# Altium PCB NixieClock.PcbDoc
Units mil, origin at the board's own origin, x right, y up, seen from the top; angles counter-clockwise.
Board outline 9855.03 x 1995.03 mil, 2 copper layers (Top Layer, Bottom Layer); 72 components, 151 nets, 487 pads, 60 vias.
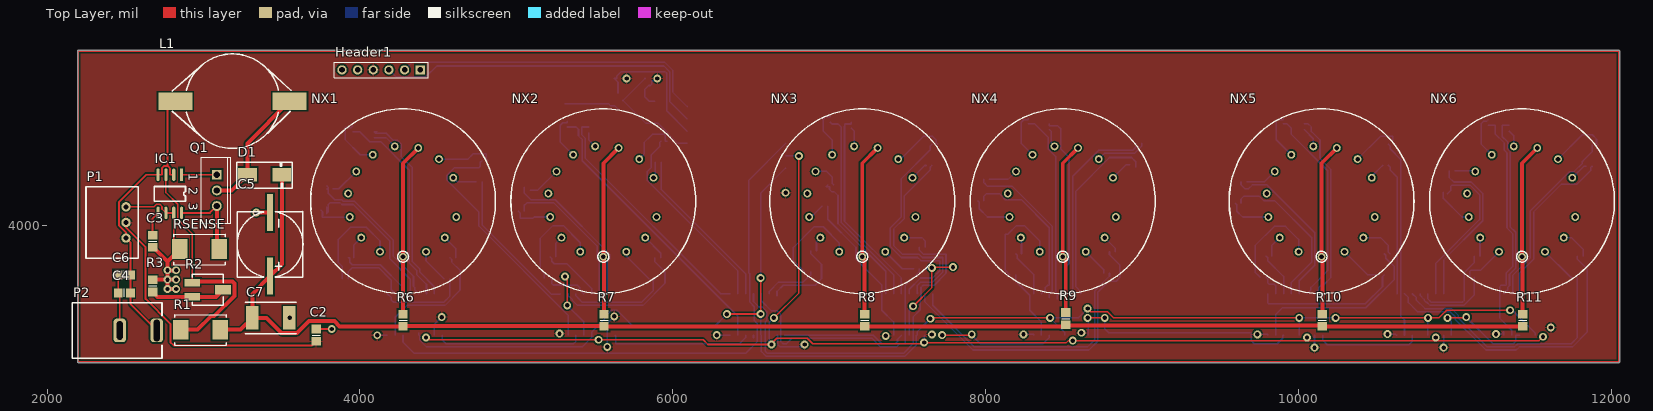
[diagram p0: Top Layer view]
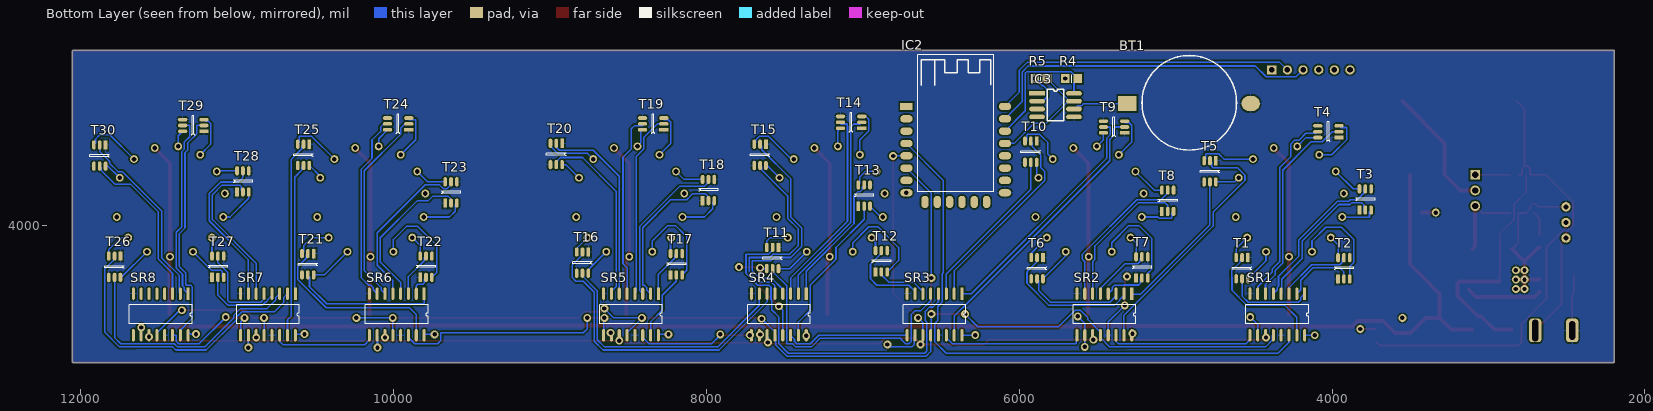
[diagram p1: Bottom Layer view, seen from below]

## Layer stack, top to bottom
Top Solder: solder mask 0.4, Solder Resist, Dk 3.5
Top Layer: signal copper 1.4
Dielectric 1: dielectric 12.6, FR-4, Dk 4.8
Bottom Layer: signal copper 1.4
Bottom Solder: solder mask 0.4, Solder Resist, Dk 3.5

## Board outline
2201.33,3125.17 cw(c2200,3130) 2194.99,3130 2194.99,5115 cw(c2200,5115) 2200,5120.02 12045,5120.02 cw(c12045,5115) 12050.01,5115 12050.01,3130.03 12050.01,3130 cw(c12045,3130) 12045,3124.99 2202.67,3124.99 cw(c2202.67,3130)

## Design rules (kind name [scope] priority, off if disabled: settings)
Clearance [All] p1: gap=10 ignorepadtopadclearanceinfootprint=FALSE except(0: Arc-Hole Track-Hole SMDPad-Hole THPad-Hole Via-Hole Fill-Hole Poly-Hole Region-Hole Text-Hole)
PolygonConnect [All] p1: connectstyle=Relief reliefconductorwidth=10 reliefentries=4 polygonreliefangle="90 Angle" airgapwidth=10
RoutingVias [All] p1: holewidth=28 width=50 viastyle="Through Hole" minholewidth=28 minwidth=50 maxholewidth=28 maxwidth=50
SolderMaskExpansion [All] p1: expansion=4
Width [All] p1: maxlimit=25 minlimit=10 preferedwidth=12 minimp=50.000000 maximp=50.000000 favimp=50.000000
30 further rules are at their usual default settings.

## Classes and differential pairs
component class Hours: BT1 Header1 IC2 IC3 NX1 NX2 NX3 NX4 NX5 NX6 R4 R5 R6 R7 R8 R9 R10 R11 SR1 SR3 SR4 SR5 SR7 SR8 T1 T2 T3 T4 T5 T6 T7 T8 T9 T10 T11 T12 T13 T14 T15 T16 T17 T18 T19 T20 T21 T22 T23 T24 T25 T26 T27 T28 T29 T30
component class Power: C2 C3 C4 C5 C6 C7 D1 IC1 L1 P1 P2 Q1 R1 R2 R3 RSENSE

## Components (designator, comment, footprint, x,y, rotation, side; value= is the part's Value field where it differs from the comment)
BT1 "Battery" cr1220 5307.4,4780 r180 bottom
C2 "Cap" 6-0805_M 3720,3300 r270 top value=10uF
C3 "Cap" 6-0805_M 2675,3900 r90 top value=10uF
C4 "Cap" 6-0805_M 2494.37,3570 r0 top value=100nF
C5 "Cap2" G17 3425,3880 r270 top value=4.7uF
C6 "Cap" 6-0805_M 2495,3685 r0 top value=10uF
C7 "Cap" Cap2420 3430,3410 r180 top value=100nF
D1 "Diode" DO-214AA 3390.63,4325 r0 top
Header1 "Header 6" HDR1X6 4385,4995 r180 top
IC1 "MAX1771ESA" SOIC-8(1.27mm) 2860,4325 r270 top
IC2 "ESP12-F" ESP12-F 6720,4761.22 r180 bottom
IC3 "DS3232MZ+" DS3231 5885,4845 r180 bottom
L1 "Inductor" SMDInductor 3185,4795 r0 top value=100mH
NX1 "in-18" in-18 4275,4155.69 r0 top locked
NX2 "in-18" in-18 5555,4155.69 r0 top locked
NX3 "in-18" in-18 7210,4155.69 r0 top locked
NX4 "in-18" in-18 8490.88,4155.69 r0 top locked
NX5 "in-18" in-18 10145,4155.69 r0 top locked
NX6 "in-18" in-18 11425.88,4155.69 r0 top locked
P1 "R-78E3.3-1.0" R-78E3.3-1.0 2505,4020 r90 top
P2 "BarrelConnector5.5" BarrelConnector5.5 2465,3330 r90 top
Q1 "MOSFET-N" TO-220-AB 3085,4225 r270 top
R1 "Res1" Res2512 2980,3335 r0 top value=1.5M
R2 "RPot" PVG3G 2929,3590 r270 top value=5K
R3 "Res1" 6-0805_M 2675,3615 r270 top value=10K
R4 "Res1" 6-0805_M 5664.37,4940 r0 bottom value=4.7K
R5 "Res1" 6-0805_M 5860.63,4940 r0 bottom value=4.7K
R6 "Res1" 6-0805_M 4275,3395 r90 top value=20K
R7 "Res1" 6-0805_M 5560,3395 r90 top value=20K
R8 "Res1" 6-0805_M 7225,3395 r90 top value=20K
R9 "Res1" 6-0805_M 8510,3405 r90 top value=20K
R10 "Res1" 6-0805_M 10150,3395 r90 top value=20K
R11 "Res1" 6-0805_M 11430,3395 r90 top value=20K
RSENSE "Res1" Res2512 2975,3850 r0 top value=0.05
SR1 "74VHC595" 74VHC595 4175,3565 r270 bottom
SR2 "74VHC595" 74VHC595 5280,3565 r270 bottom
SR3 "74VHC595" 74VHC595 6365,3565 r270 bottom
SR4 "74VHC595" 74VHC595 7360,3565 r270 bottom
SR5 "74VHC595" 74VHC595 8305,3565 r270 bottom
SR6 "74VHC595" 74VHC595 9802.02,3565 r270 bottom
SR7 "74VHC595" 74VHC595 10625,3565 r270 bottom
SR8 "74VHC595" 74VHC595 11310,3565 r270 bottom
T1 "A42-array" SOT457 4537.6,3795.83 r270 bottom
T2 "A42-array" SOT457 3961.52,3659.17 r90 bottom
T3 "A42-array" SOT457 3824.8,4099.17 r90 bottom
T4 "A42-array" SOT457 3955,4562.6 r0 bottom
T5 "A42-array" SOT457 4742.6,4415 r270 bottom
T6 "A42-array" SOT457 5847.6,3795.83 r270 bottom
T7 "A42-array" SOT457 5252.4,3665 r90 bottom
T8 "A42-array" SOT457 5087.4,4090.94 r90 bottom
T9 "A42-array" SOT457 5325,4592.6 r0 bottom
T10 "A42-array" SOT457 5887.6,4540 r270 bottom
T11 "A42-array" SOT457 7537.6,3860.83 r270 bottom
T12 "A42-array" SOT457 6917.4,3704.17 r90 bottom
T13 "A42-array" SOT457 7027.4,4124.17 r90 bottom
T14 "A42-array" SOT457 7005,4622.6 r0 bottom
T15 "A42-array" SOT457 7617.6,4520 r270 bottom
T16 "A42-array" SOT457 8752.6,3831.66 r270 bottom
T17 "A42-array" SOT457 8227.4,3685 r90 bottom
T18 "A42-array" SOT457 8022.4,4159.17 r90 bottom
T19 "A42-array" SOT457 8270,4612.6 r0 bottom
T20 "A42-array" SOT457 8920,4525.83 r270 bottom
T21 "A42-array" SOT457 10507.6,3820.83 r270 bottom
T22 "A42-array" SOT457 9827.4,3669.17 r90 bottom
T23 "A42-array" SOT457 9667.4,4144.17 r90 bottom
T24 "A42-array" SOT457 9900,4612.6 r0 bottom
T25 "A42-array" SOT457 10535.2,4520 r270 bottom
T26 "A42-array" SOT457 11742.6,3805 r270 bottom
T27 "A42-array" SOT457 11157.4,3669.17 r90 bottom
T28 "A42-array" SOT457 10997.4,4214.17 r90 bottom
T29 "A42-array" SOT457 11209.17,4602.6 r0 bottom
T30 "A42-array" SOT457 11837.6,4515.83 r270 bottom

## Footprints (in the part's own frame and the unit in brackets; to place one, negate y for a bottom-side part, rotate by r counter-clockwise, add the part's x,y. Pads: shape width x height; smd on the part's side, far side on the other; paste and mask are expansions set on the pad)
6-0805_M [mm] "Chip Resistor, Body 2.0x1.2mm, IPC Low Density"
  rect 1.4x1.5 smd: 1(-1,0) 2(1,0)
  silkscreen extent 0,-0.65 0,0.65, body extent -1.07,-0.7 1.07,0.7, height 0.7
74VHC595 [mm]
  rect 2x0.5 smd: 1(0,0)
  oval 2x0.5 smd: 2(0,-1.27) 3(0,-2.54) 4(0,-3.81) 5(0,-5.08) 6(0,-6.35) 7(0,-7.62) 8(0,-8.89) 9(6.75,-8.89) 10(6.75,-7.62) 11(6.75,-6.35) 12(6.75,-5.08) 13(6.75,-3.81) 14(6.75,-2.54) 15(6.75,-1.27) 16(6.75,0)
  silkscreen extent 1.84,-9.53 4.91,0.63
BarrelConnector5.5 [mm]
  rrect50% 3.81x2 hole 1 slot 3.5 at 0 deg: 1(0,-6)
  rrect50% 3.81x2 hole 1 slot 3 at 0 deg: 2(0,0)
  silkscreen extent -4.5,-6.86 4.5,7.7
Cap2420 [mm]
  rect 2x3.8 smd: 1(-3,0) 2(3,0)
  silkscreen extent -4.14,-2.54 4.14,2.54
cr1220 [mm]
  rect 3x2.5 smd: 1(0,0)
  oval 3x2.5 smd: 2(20,0)
  silkscreen extent 2.36,-7.55 17.71,7.8, body extent 2.41,-7.62 21.84,7.75, height 4
DO-214AA [mil]
  rect 120x86 smd: 1(-110,0) 2(110,0)
  silkscreen extent -177,-85 177,80
DS3231 [mil]
  rect 100x30 smd: 1(0,0)
  oval 100x30 smd: 2(0,-50) 3(0,-100) 4(0,-150) 5(236,-150) 6(236,-100) 7(236,-50) 8(236,0)
  silkscreen extent 65,-175 170,25, body extent 40,-185 195,30, height 69
ESP12-F [mm]
  rect 2x1.2 smd: 1(0,0)
  oval 2x1.2 smd: 2(0,-2) 3(0,-4) 4(0,-6) 5(0,-8) 6(0,-10) 7(0,-12) 8(0,-14) 15(16,-14) 16(16,-12) 17(16,-10) 18(16,-8) 19(16,-6) 20(16,-4) 21(16,-2) 22(16,0)
  oval 1.2x2 smd: 9(3.018,-15.492) 10(5.018,-15.492) 11(7.018,-15.492) 12(9.018,-15.492) 13(11.018,-15.492) 14(13.018,-15.492)
  silkscreen extent 1.84,-13.84 14.17,8.38
G17 [mm]
  rect 6x1 smd: 1(5.15,0) 2(-5.15,0)
  silkscreen extent -5.33,-5.33 5.31,5.35
HDR1X6 [mm] "Connector; Header; 6 Position"
  rect 1.5x1.5 hole 0.9: 1(0,0)
  round 1.5 hole 0.9: 2(2.54,0) 3(5.08,0) 4(7.62,0) 5(10.16,0) 6(12.7,0)
  silkscreen extent -1.27,-1.27 13.97,1.27
in-18 [mm]
  round 1.27 hole 0.75: 1(8.629,-2.556) 2(6.792,-5.904) 3(3.732,-8.19) 4(0,-9) 5(-3.732,-8.19) 6(-6.792,-5.904) 7(-8.629,-2.556) 8(-8.912,1.253) 9(-7.591,4.836) 10(-4.902,7.548) 11(-1.33,8.901) 12(2.481,8.651) 13(5.845,6.844) 14(8.157,3.804)
  silkscreen extent -15,-15 15,15
PVG3G [mil]
  rect 47x100 smd: 1(45,0) 3(-45,0)
  rect 59x100 smd: 2(0,196)
  silkscreen extent -100,0 100,196
R-78E3.3-1.0 [mm]
  round 1.5 hole 0.8: 1(-2.54,0) 2(0,0) 3(2.54,0)
  silkscreen extent -5.8,-2 5.8,6.5
Res2512 [mm]
  rect 2.5x3.2 smd: 1(-3.2,0) 2(3.2,0)
  silkscreen extent -4.19,-2.54 4.19,2.41
SMDInductor [mm]
  rect 5.5x2.79 smd: 1(-9.27,0) 2(9.27,0)
  silkscreen extent -9.78,-7.67 9.53,7.67
SOIC-8(1.27mm) [mil]
  rect 80x20 smd: 1(0,0)
  oval 80x20 smd: 2(0,-50) 3(0,-100) 4(0,-150) 5(244,-150) 6(244,-100) 7(244,-50) 8(244,0)
  silkscreen extent 75,-175 169,25
SOT457 [mm]
  rect 1.5x0.6 smd: 1(0,0)
  oval 1.5x0.6 smd: 2(0,-0.95) 3(0,-1.9) 4(3.45,-1.9) 5(3.45,-0.95) 6(3.45,0)
  silkscreen extent 1.52,-2.54 2,0.63
TO-220-AB [mm] "TO, Thru-Hole, Vertical, Heatsink Mounted; 3 In-Line Leads; Pitch 2.54 mm"
  rect 1.6x1.6 hole 1: 1(-2.54,0)
  round 1.6 hole 1: 2(0,0) 3(2.54,0)
  silkscreen extent -5.35,-2.55 5.35,2.25

## Part data
BT1: "Multicell Battery", LatestRevisionDate=17-Jul-2002, LatestRevisionNote="Re-released for DXP Platform.", PackageDescription="Battery; 2 Leads", PackageReference=BAT-2, Published=24-Mar-1999, Publisher="Altium Limited"
C2 C3 C4 C5 C6 C7: "Capacitor", Publisher="Altium Limited"
  C2 C3 C4 C6 C7: LatestRevisionDate=17-Jul-2002, LatestRevisionNote="Re-released for DXP Platform.", PackageDescription="Radial Cap, Thru-Hole; 2 Leads; 0.3 in Pin Spacing", PackageReference=RAD-0.3, Published=8-Jun-2000
  C5: PackageDescription="Capacitor; 2 Leads", PackageReference=CAPR5-4X5, Published=23-Sep-2002
D1: "Default Diode", Code_JEDEC=DO-214-AB, LatestRevisionDate=17-Jul-2002, LatestRevisionNote="Re-released for DXP Platform.", PackageDescription="DO-214-AB/SMC; 2 C-Bend Leads; Body 7.9 x 5.9 mm, inc. leads (LxW)", PackageReference=SMC, PackageVersion=Sep-1996, Published=8-Jun-2000, Publisher="Altium Limited"
Header1: "Header, 6-Pin", LatestRevisionDate=17-Jul-2002, LatestRevisionNote="Re-released for DXP Platform.", Publisher="Altium Limited"
IC3: "+/-5ppm, I2C Real-Time Clock with Internal MEMs Resonator and SRAM, 8-Pin SO, -40 to 85 degC, Pb-Free", Code_IPC=SOIC127P600-8, Code_JEDEC=MS-012-AA, ComponentLink1Description="Manufacturer URL", ComponentLink1URL=http://www.maxim-ic.com, ComponentLink2Description=Datasheet, ComponentLink2URL=http://datasheets.maxim-ic.com/en/ds/DS3232M.pdf, ComponentLink3Description="Package Specification", ComponentLink3URL=http://pdfserv.maxim-ic.com/package_dwgs/21-0041.PDF, DatasheetVersion="Rev 0, Mar-2012", PackageDescription="8-Pin Small-Outline IC, Narrow (0.15in), 1.27 mm Pitch, SOIC (N), Pb-Free", PackageReference=S8MK+1, PackageVersion="revC, 2010"
Q1: "N-Channel MOSFET", LatestRevisionDate=17-Jul-2002, LatestRevisionNote="Re-released for DXP Platform.", PackageDescription="TO, Flat Index; 3 In-Line, Axial Leads; Body Dia. 4.6mm; Lead Dia. 0.5 mm (max)", PackageReference=E3, PackageVersion=1995/1996, Published=8-Jun-2000, Publisher="Altium Limited"
R1 R3 R4 R5 R6 R7 R8 R9 R10 R11 RSENSE: "Resistor", LatestRevisionDate=17-Jul-2002, LatestRevisionNote="Re-released for DXP Platform.", PackageDescription="Axial Device, Thru-Hole; 2 Leads; 0.3 in Pin Spacing", PackageReference=AXIAL-0.3, Published=8-Jun-2000, Publisher="Altium Limited"
R2: "Potentiometer", LatestRevisionDate=17-Jul-2002, LatestRevisionNote="Re-released for DXP Platform.", PackageDescription="Variable Resistor, Thru-Hole; 3 Leads", PackageReference=VR5, Published=8-Jun-2000, Publisher="Altium Limited", Set Position=0.5, Sim Note="Enter the Resistance value and the set point into parameter fields."
L1: Code_IEC=1005, Code_JEITA=0402, LatestRevisionDate=29-May-2009, LatestRevisionNote="IPC-7351 Footprint Added.", PackageDescription="Chip Inductor", PackageReference=0402-A, Published=8-Jun-2000, Publisher="Altium Limited"

## Via types
v1: diameter 50, hole 28, Top Layer to Bottom Layer, 60 vias

## Nets (pads, with @x,y where several pads share a name; then routed paths per layer and width w, separated by ;. In a path a pad name is that pad's centre, name@x,y a point inside that pad or via, vN(x,y) a via of type N, cw(c..) or ccw(c..) an arc to the next point about the centre after c; other vN are vias at no path point)
3V3: C2.2 Header1.4 IC2.8 IC3.2 P1.2 R4.2 R5.2 SR1.10 SR1.16 SR2.10 SR2.16 SR3.10 SR3.16 SR4.10 SR4.16 SR5.10 SR5.16 SR6.10 SR6.16 SR7.10 SR7.16 SR8.10 SR8.16 | length 3286.4
  Top Layer w10: v1(7655,3304.02) v1@7659.88,3299.14
  Top Layer w12: P1.2 2505,3986.73 2629.47,3862.25 2629.47,3532.07 2788.8,3372.74 2788.8,3256.01 2810,3234.81 3694.18,3234.81 C2.2
  Bottom Layer w10: v1(4110.42,3299.25) SR1.16 ; SR1.10 4475,3367.23 v1(4522.77,3415) ; v1(5275,3310) 5280,3305 SR2.16 ; v1(5580,3225) SR2.10 5580,3375 v1(5625,3420) ; IC3.2 5848.79,4795 5820,4823.79 5820,4870 5845.47,4895.47 5855.03,4895.47 5863.82,4904.26 5863.82,4924.83 5885,4924.83 v1(5900,4939.83) ; v1(6280,3300) 6365,3300 SR3.16 ; SR3.10 6670.16,3299.25 6670.16,3239.43 6684.71,3224.88 6826.35,3224.88 v1(6841.47,3240) ; v1(8240,3305) 8305,3305 SR5.16 ; v1(9735,3305) 9802.02,3305 SR6.16 ; v1(10100,3220) 10100,3297.24 SR6.10 ; v1(10566.2,3306.57) 10617.68,3306.57 SR7.16 ; v1(10925,3220) SR7.10 ; v1(11260,3306.57) 11295.65,3306.57 11310,3320.93 SR8.16
  other v1: 7360,3295 8610,3315 11610,3349.01 6720,4210.04 5703.74,4940
12V: C4.2 C6.2 IC1.2 IC1.4 L1.1 P1.1 P2.1 | length 1872.4
  Top Layer w12: P2.1 2533.74,3497.48 C4.2 2534.37,3570.63 C6.2 2534.37,3890.63 P1.1 2505,3955.61 2459.47,4001.14 2459.47,4049.69 2460,4050.22 2460,4100.61 2459.47,4101.14 2459.47,4149.47 2635,4325 IC1.4 2734,4325 2734,4365.77 2749.23,4381 2770.77,4381 ; IC1.2 2786,4325 2786,4365.77 2770.77,4381 ; L1.1 2770.77,4745.73 2770.77,4381
GND: BT1.2 C2.1 C3.1 C4.1 C5.2 C6.1 C7.1 Header1.6 IC1.6 IC1.7 IC2.15 IC3.5 P1.3 P2.2 R3.1 RSENSE.1 SR1.8 SR1.13 SR2.8 SR2.13 SR3.8 SR3.13 SR4.8 SR4.13 SR5.8 SR5.13 SR6.8 SR6.13 SR7.8 SR7.13 SR8.8 SR8.13 T1.1 T1.4 T2.1 T2.4 T3.1 T3.4 T4.1 T4.4 T5.1 T5.4 T6.1 T6.4 T7.1 T7.4 T8.1 T8.4 T9.1 T9.4 T10.1 T10.4 T11.1 T11.4 T12.1 T12.4 T13.1 T13.4 T14.1 T14.4 T15.1 T15.4 T16.1 T16.4 T17.1 T17.4 T18.1 T18.4 T19.1 T19.4 T20.1 T20.4 T21.1 T21.4 T22.1 T22.4 T23.1 T23.4 T24.1 T24.4 T25.1 T25.4 T26.1 T26.4 T27.1 T27.4 T28.1 T28.4 T29.1 T29.4 T30.1 T30.4 | length 2930.8
  Top Layer w10: C6.1 2455.63,3570.63 C4.1 2465,3560 P2.2 ; P1.3 2683.64,4120 2699.64,4136 2720.36,4136 2735,4121.36 2735,4106 IC1.6 ; C7.1 v1(3550,3410) ; C2.1 v1(3819.37,3339.37) ; v1(5310,3675) 5325,3660 v1(5325,3490) ; v1(7535,3485) 7655,3605 v1(7655,3730) 7660,3735 v1(7790,3735)
  Top Layer w12: IC1.6 IC1.7 2810,3889.02 RSENSE.1
  Top Layer w25: R3.1 2769.37,3654.37 v1(2770,3655) ; C3.1 2680.35,3860.63 2770,3770.98 ; v1@2824.02,3655 v1(2770,3655) ; v1(2825,3595) v1(2770,3595) v1(2770,3655) ; v1(2825,3714.17) v1(2770,3714.17) ; RSENSE.1 2770,3770.98 ; v1(3337.24,4082.76) C5.2 ; v1(2770,3655) v1(2770,3714.17) ; v1(2770,3714.17) 2770,3770.98
  Bottom Layer w10: v1(5325,3490) 5430,3385 SR2.13 ; SR3.13@6515,3284.59 SR3.13 ; SR4.13 7510,3460 v1(7535,3485) ; T11.4 7650,3725 v1(7655,3730)
  other v1: 2825,3655
HA0: NX1.2 T1.3 | length 156.4
  Bottom Layer w10: NX1.2 4612.4,3853.22 T1.3
HA1: NX1.3 T1.6 | length 221.2
  Bottom Layer w10: NX1.3 4421.94,3775.66 T1.6
HA2: NX1.5 T2.3 | length 668.3
  Bottom Layer w10: T2.3 3886.72,3739.37 3859.91,3766.18 3859.91,3883.28 3860,3883.38 3860,3910 3940,3990 4040,3990 4128.07,3901.93 NX1.5
HA3: NX1.6 T2.6 | length 147.3
  Bottom Layer w10: T2.6 3961.52,3877.16 NX1.6
HA4: NX1.7 T3.3 | length 223.8
  Bottom Layer w10: T3.3 3760.59,4088.58 3760.59,4054.65 3934.87,4054.65 NX1.7
HA5: NX1.9 T3.6 | length 197.4
  Bottom Layer w10: T3.6 3865.09,4235 NX1.9
HA6: NX1.10 T4.3 | length 348.5
  Bottom Layer w10: T4.3 3944.41,4626.81 3905,4626.81 3905,4550 4002.15,4452.85 NX1.10
HA7: NX1.11 T4.6 | length 155.2
  Bottom Layer w10: T4.6 4166.15,4562.6 NX1.11
HA8: NX1.13 T5.3 | length 365.1
  Bottom Layer w10: NX1.13 4690.17,4425.12 4724.57,4459.53 4807.28,4459.53 4807.28,4425.12 T5.3
HA9: NX1.14 T5.6 | length 157.3
  Bottom Layer w10: NX1.14 4622.39,4279.17 T5.6
HB0: NX2.2 T6.3 | length 168.8
  Bottom Layer w10: NX2.2 5922.4,3823.22 T6.3
HB1: NX2.3 T6.6 | length 233.6
  Bottom Layer w10: NX2.3 5701.94,3805.66 T6.6
HB2: NX2.5 T7.3 | length 657.5
  Bottom Layer w10: T7.3 5177.6,3695.12 5150.79,3721.93 5150.79,3916.99 5233.8,4000 5298.77,4000 5408.07,3890.7 NX2.5
HB3: NX2.6 T7.6 | length 137
  Bottom Layer w10: T7.6 5252.4,3888.04 NX2.6
HB4: NX2.7 T8.3 | length 244.6
  Bottom Layer w10: T8.3 5023.19,4080.35 5023.19,4046.41 5105.43,4046.41 5114.06,4055.05 NX2.7
HB5: NX2.9 T8.6 | length 218.2
  Bottom Layer w10: T8.6 5136.86,4226.77 NX2.9
HB6: NX2.10 T9.3 | length 284
  Bottom Layer w10: T9.3 5325,4656.81 5296.18,4656.81 5280.47,4641.11 5280.47,4580.47 5280,4580 5280,4534.87 NX2.10
HB7: NX2.11 T9.6 | length 103.8
  Bottom Layer w10: T9.6 5460.83,4547.92 NX2.11
HB8: NX2.13 T10.3 | length 327.9
  Bottom Layer w10: NX2.13 5815.54,4455.55 5815.54,4530.54 5855,4570 ; 5855.05,4570 5869.57,4584.53 5945.22,4584.53 5951.81,4577.94 5951.81,4540 T10.3
HB9: NX2.14 T10.6 | length 103.5
  Bottom Layer w10: NX2.14 5887.6,4316.9 T10.6
HV: C5.1 C7.2 D1.2 R1.2 R6.1 R7.1 R8.1 R9.1 R10.1 R11.1 | length 9441.6
  Top Layer w25: R1.2 3236.89,3335 C7.2 ; D1.2 3500.63,3752.87 C5.1 3311.89,3564.13 C7.2 ; R11.1 R10.1 10143.13,3362.5 8516.87,3362.5 8510,3355.63 R8.1 R7.1 5558.13,3357.5 4276.87,3357.5 R6.1 3870.29,3355.63 3836.49,3389.43 3673.53,3389.43 3596.8,3312.7 3499.42,3312.7 3402.12,3410 C7.2
MA0: NX3.2 T11.3 | length 185.2
  Bottom Layer w10: NX3.2 7591.49,3923.22 7612.4,3902.32 T11.3
MA1: NX3.3 T11.6 | length 225.5
  Bottom Layer w10: NX3.3 7465.19,3725 T11.6
MA2: NX3.5 T12.3 | length 631.9
  Bottom Layer w10: T12.3 6770,3776.77 6770,3860 6901.92,3991.92 6960,3991.92 7063.07,3888.85 NX3.5
MA3: NX3.6 T12.6 | length 93.7
  Bottom Layer w10: T12.6 6917.4,3898.04 NX3.6
MA4: NX3.7 T13.3 | length 111
  Bottom Layer w10: NX3.7 6883.48,4055.05 T13.3
MA5: NX3.9 T13.6 | length 176.2
  Bottom Layer w10: NX3.9 6982.83,4346.07 7016.81,4312.08 7016.81,4270.59 T13.6
MA6: NX3.10 T14.3 | length 303
  Bottom Layer w10: T14.3 6977.4,4697.4 6960,4680 6960.47,4679.53 6960.47,4604.57 7017.02,4548.03 NX3.10
MA7: NX3.11 T14.6 | length 123.4
  Bottom Layer w10: T14.6 7157.63,4605.8 NX3.11
MA8: NX3.13 T15.3 | length 343.7
  Bottom Layer w10: NX3.13 7455.12,4425.12 7600,4570 7660.63,4570 7681.81,4548.82 7681.81,4530.59 T15.3
MA9: NX3.14 T15.6 | length 119.1
  Bottom Layer w10: NX3.14 7609.87,4384.17 T15.6
MB0: NX4.2 T16.3 | length 126.7
  Bottom Layer w10: NX4.2@8758.28,3916.72 NX4.2 8827.4,3854.11 T16.3
MB1: NX4.3 T16.6 | length 185
  Bottom Layer w10: NX4.3 8752.6,3718.48 T16.6
MB2: NX4.5 T17.3 | length 624.2
  Bottom Layer w10: T17.3 8123.43,3714.17 8123.43,3945 8140,3945 8195,4000 8245,4000 8343.95,3901.05 NX4.5
MB3: NX4.6 T17.6 | length 104
  Bottom Layer w10: NX4.6 8227.4,3919.29 T17.6
MB4: NX4.7 T18.3 | length 271
  Bottom Layer w10: T18.3 7958.19,4148.58 7958.19,4107.09 8010.23,4055.05 NX4.7
MB5: NX4.9 T18.6 | length 190.8
  Bottom Layer w10: T18.6 8140.98,4295 NX4.9
MB6: NX4.10 T19.3 | length 300.3
  Bottom Layer w10: T19.3 8270,4676.81 8241.18,4676.81 8225.47,4661.11 8225.47,4600.47 8225,4600 8225,4525.75 NX4.10
MB7: NX4.11 T19.6 | length 120
  Bottom Layer w10: T19.6 8418.51,4599.92 8418.51,4526.12 NX4.11
MB8: NX4.13 T20.3 | length 326.2
  Bottom Layer w10: NX4.13 8757.18,4461.3 8948.51,4461.3 8994.8,4507.6 T20.3
MB9: NX4.14 T20.6 | length 143
  Bottom Layer w10: NX4.14 8896.58,4390 T20.6
NetBT1_1: BT1.1 IC3.6 | length 356.1
  Bottom Layer w10: BT1.1 5586.57,4780 5601.57,4765 5629,4765 IC3.6
NetC3_2: C3.2 IC1.5 | length 156.1
  Top Layer w12: C3.2 2675,4046 IC1.5
NetD1_1: D1.1 L1.2 Q1.2 | length 818.6
  Top Layer w25: Q1.2 3180.63,4225 D1.1 3280.63,4525.67 L1.2
NetHeader1_2: Header1.2 IC2.22 | length 2024.9
  Bottom Layer w10: Header1.2 4335,5045 5945.62,5045 6000,4990.62 6000,4851.3 IC2.22
NetHeader1_3: Header1.3 IC2.21 | length 2203.3
  Bottom Layer w10: Header1.3 4229.53,4950.47 4420.74,4950.47 4490.27,5020 5942.34,5020 5980,4982.34 5980,4792.56 IC2.21
NetIC1_1: IC1.1 Q1.1 | length 225
  Top Layer w12: IC1.1 Q1.1
NetIC1_3: IC1.3 R1.1 R2.3 | length 1544.6
  Top Layer w10: IC1.3 2760,4211 2835,4136 2835,4040.64 2929,3946.64 2929,3642 R2.3
  Top Layer w25: R1.1 2961.96,3335 3047.45,3420.49 3066.81,3420.49 3197.5,3551.18 3197.5,3628.82 3184.32,3642 R2.3@2929,3642
NetIC1_8: IC1.8 Q1.3 RSENSE.2 | length 524.8
  Top Layer w12: IC1.8 3041,4081 Q1.3
  Top Layer w25: Q1.3 3085,3865.98 RSENSE.2
NetIC2_4: IC2.4 SR1.14 | length 3755.5
  Bottom Layer w10: SR1.14 4275,3255 4345,3185 6465.41,3185 6539.84,3259.43 6539.84,3373.59 6520,3393.43 6520,3481.2 6490.16,3511.04 6490.16,3693.13 6483.82,3699.47 6483.82,4288.82 IC2.4
NetNX1_4: NX1.4 NX1.12 R6.2 | length 1102.4
  Top Layer w25: R6.2 NX1.4 4275,4398.61 NX1.12
NetNX2_4: NX2.4 NX2.12 R7.2 | length 1104.5
  Top Layer w25: R7.2 5560,3796.35 NX2.4 5555,4398.61 NX2.12
NetNX3_4: NX3.4 NX3.12 R8.2 | length 1108.6
  Top Layer w25: R8.2 7225,3786.35 NX3.4 7210,4398.61 NX3.12
NetNX4_4: NX4.4 NX4.12 R9.2 | length 1110.3
  Top Layer w25: R9.2@8510,3434.37 8510,3782.24 NX4.4 8490.88,4398.61 NX4.12
NetNX5_4: NX5.4 NX5.12 R10.2 | length 1104.5
  Top Layer w25: R10.2 10150,3796.35 NX5.4 10145,4398.61 NX5.12
NetNX6_4: NX6.4 NX6.12 R11.2 | length 1104.1
  Top Layer w25: R11.2 11430,3797.24 NX6.4 11425.88,4398.61 NX6.12
NetR2_1: R2.1 R2.2 R3.2 | length 481.3
  Top Layer w25: R3.2 2705.63,3545 R2.1 3080,3545 R2.2
NetSR1_1: SR1.1 T1.5 | length 557.7
  Bottom Layer w10: SR1.1 4200.16,3539.84 4200.16,3525.18 4215.34,3510 4534.66,3510 4575,3550.34 T1.5
NetSR1_2: SR1.2 T2.2 | length 460.8
  Bottom Layer w10: T2.2 3924.12,3704.12 3950,3730 4121.36,3730 4199.84,3651.52 4199.84,3590.16 SR1.2
NetSR1_3: SR1.3 T2.5 | length 486.3
  Bottom Layer w10: T2.5 3934.71,3795 3934.71,3766.18 3950.41,3750.47 4129.17,3750.47 4275,3604.65 SR1.3
NetSR1_4: SR1.4 T3.2 | length 993.3
  Bottom Layer w10: T3.2@3787.4,4118.92 T3.2 3787.4,4077.43 3797.99,4088.02 3797.99,4134.91 3808.08,4145 3874.79,4145 3884.79,4135 3957.23,4135 4191.54,3900.69 4191.54,3787.65 4321.94,3657.25 4321.94,3568.06 SR1.4
NetSR1_5: SR1.5 T3.5 | length 1014.8
  Bottom Layer w10: T3.5 3797.99,4224.41 3797.99,4206.18 3839.17,4165 3883.07,4165 3893.07,4155 3965.52,4155 4211.54,3908.98 4211.54,3806.03 4341.94,3675.63 4341.94,3612.72 4349.84,3604.82 4349.84,3590.16 SR1.5 ; T3.5@3787.4,4254.75 3797.99,4244.16 T3.5@3797.99,4225.93
NetSR1_6: SR1.6 T4.2 | length 1296.8
  Bottom Layer w10: T4.2 3997.79,4600 4062,4535.79 4133.74,4535.79 4315,4354.53 4315,3761.35 4361.94,3714.42 4361.94,3687.24 4425,3624.17 SR1.6
NetSR1_7: SR1.7 T4.5 | length 1267.7
  Bottom Layer w10: T4.5@4109.06,4600 T4.5 4101.42,4589.41 4167.62,4589.41 4210.91,4546.12 4239.19,4546.12 4262.63,4522.69 4262.63,4442.37 4335,4370 4335,3769.64 4381.94,3722.7 4381.94,3703.06 4475,3610 SR1.7
NetSR1_9: SR1.9 SR2.14 | length 940.3
  Bottom Layer w10: SR1.9 4525,3270 4550,3245 5269.59,3245 5269.71,3244.88 5290.29,3244.88 5290.41,3245 5319.59,3245 5319.71,3244.88 5364.88,3244.88 5380,3260 SR2.14
NetSR1_15: SR1.15 T1.2 | length 837.7
  Bottom Layer w10: SR1.15 4225,3415 4300,3490 4542.94,3490 4639.21,3586.27 4639.21,3668.39 4640,3669.17 4640,3712.6 4585.59,3767 4585.59,3785.24 T1.2
NetSR2_1: SR2.1 T5.5 | length 958.5
  Bottom Layer w10: T5.5 4780,4005 5222.5,3562.5 5277.5,3562.5 SR2.1
NetSR2_2: SR2.2 T6.2 | length 911
  Bottom Layer w10: SR2.2 5330,3550.34 5335.34,3545 5339.45,3545 5355.16,3529.3 5355.16,3525.18 5390.34,3490 5808.03,3490 5949.21,3631.18 5949.21,3704.53 5885,3768.74 T6.2
NetSR2_3: SR2.3 T6.5 | length 636.4
  Bottom Layer w10: SR2.3 5380,3551.38 5405.16,3526.22 5405.16,3525.18 5419.71,3510.63 5420.75,3510.63 5421.38,3510 5799.75,3510 5874.41,3584.66 5874.41,3649.41 T6.5
NetSR2_4: SR2.4 T7.2 | length 285.9
  Bottom Layer w10: T7.2 5225.59,3665 5225.59,3629.26 5234.38,3620.47 5329.19,3620.47 5330.29,3619.37 5390.29,3619.37 5404.84,3604.82 5404.84,3590.16 SR2.4
NetSR2_5: SR2.5 T7.5 | length 393.9
  Bottom Layer w10: T7.5 5225.59,3790.24 5225.59,3772 5241.3,3756.3 5323.7,3756.3 5480,3600 SR2.5
NetSR2_6: SR2.6 T8.2 | length 935.2
  Bottom Layer w10: T8.2 5050,4130 5065,4145 5239.64,4145 5515,3869.64 5515,3784.79 5530,3769.79 SR2.6
NetSR2_7: SR2.7 T8.5 | length 1002.4
  Bottom Layer w10: T8.5@5050,4245 T8.5 5050,4208.54 5093.54,4165 5247.92,4165 5595,3817.92 5595,3784.79 5580,3769.79 SR2.7
NetSR2_9: SR2.9 SR3.14 | length 917.3
  Bottom Layer w10: SR2.9 5635.75,3293.5 5635.75,3245 6354.59,3245 6354.71,3244.88 6375.29,3244.88 6375.41,3245 6404.59,3245 6404.71,3244.88 6425.63,3244.88 6465,3284.25 SR3.14
NetSR2_15: SR2.15 T5.2 | length 1620.4
  Bottom Layer w10: T5.2 4769.41,4404.41 4769.41,4379.26 4760.62,4370.47 4604.6,4370.47 4556.13,4322 4556.13,4288.86 4579.57,4265.43 4760,4085 4760,3996.72 5330,3426.72 SR2.15
NetSR3_1: SR3.1 T9.5 | length 1537.6
  Bottom Layer w10: T9.5 5416.3,4630 5416.3,4581.49 5440.83,4556.97 5440.83,4429.17 6305,3565 SR3.1
NetSR3_2: SR3.2 T10.2 | length 1251.6
  Bottom Layer w10: T10.2 5914.41,4529.41 5914.41,4504.26 5860,4449.85 5860,4369.3 5836.13,4345.43 5836.13,4288.86 6415,3710 SR3.2
NetSR3_3: SR3.3 T10.5 | length 1062.8
  Bottom Layer w10: T10.5 5925,4230 6465,3690 SR3.3
NetSR3_4: SR3.4 T11.2 | length 2292.2
  Bottom Layer w10: SR3.4 6515,3514.48 6549.48,3480 6571.57,3480 6600,3451.57 6600,3393.43 6590,3383.43 6590,3198.43 6603.43,3185 7474.74,3185 7534.84,3245.1 7534.84,3416.41 7580,3461.57 7580,3520 7585.16,3525.16 7585.16,3604.82 7599.71,3619.37 7669.1,3619.37 7745,3695.27 7745,3816.3 7601.3,3816.3 7575,3842.6 T11.2
NetSR3_5: SR3.5 T11.5 | length 1742.9
  Bottom Layer w10: SR3.5 6565,3520.04 6630.04,3455 6666.57,3455 6690.16,3431.41 6690.16,3259.43 6704.71,3244.88 6725.29,3244.88 6739.84,3259.43 6739.84,3259.84 6760,3280 7271.76,3280 7326.87,3224.88 7428.57,3224.88 7448.57,3244.88 7470.29,3244.88 7470.41,3245 7485,3245 7485,3575 7485.16,3575.16 7485.16,3616.93 7575,3706.77 T11.5
NetSR3_6: SR3.6 T12.2 | length 341.9
  Bottom Layer w10: SR3.6 6615,3579.66 6674.71,3639.37 6833.43,3639.37 6880,3685.94 T12.2
NetSR3_7: SR3.7 T12.5 | length 556.2
  Bottom Layer w10: SR3.7@6665,3550.34 SR3.7 6665,3579.66 6704.71,3619.37 6909.37,3619.37 6949.56,3659.56 6949.56,3752.21 6880,3821.77 T12.5
NetSR3_9: SR3.9 SR4.14 | length 799.2
  Bottom Layer w10: SR3.9 6715.75,3300 7280.04,3300 7335.16,3244.88 7420.29,3244.88 7434.84,3259.43 7434.84,3274.09 SR4.14
NetSR3_15: SR3.15 T9.2 | length 1816.5
  Bottom Layer w10: T9.2 5382.6,4630 5396.3,4616.3 5396.3,4573.21 5420,4549.51 5420,4415 6360.63,3474.37 6361.57,3474.37 6415,3420.94 SR3.15
NetSR4_1: SR4.1 T13.5 | length 877.1
  Bottom Layer w10: T13.5 6979.41,4249.41 6998.04,4249.41 7000.59,4246.86 7000.59,4231.18 7016.3,4215.47 7031.97,4215.47 7055,4192.45 7055,4012.92 7360,3707.92 SR4.1
NetSR4_2: SR4.2 T14.2 | length 1287.1
  Bottom Layer w10: T14.2 7015.59,4649.41 7057.08,4649.41 7076.3,4630.19 7076.3,4019.91 7410,3686.21 SR4.2
NetSR4_3: SR4.3 T14.5 | length 1288.8
  Bottom Layer w10: T14.5 7140.83,4649.41 7098.69,4649.41 7098.69,4636.09 7096.3,4633.7 7096.3,4028.19 7460,3664.49 SR4.3
NetSR4_4: SR4.4 T15.2 | length 1453.6
  Bottom Layer w10: SR4.4 7510,3593.8 7581.47,3665.27 7658.43,3665.27 7705,3711.84 7705,3776.3 7584.73,3776.3 7564.73,3796.3 7458.76,3796.3 7390.06,3865 7390.06,3986.11 7457.77,4053.82 7457.77,4297.62 7644.41,4484.26 7644.41,4509.41 T15.2
NetSR4_5: SR4.5 T15.5 | length 1310.7
  Bottom Layer w10: SR4.5@7564.84,3569.84 SR4.5 7560,3615.52 7583.85,3639.37 7660.81,3639.37 7725,3703.56 7725,3796.3 7593.01,3796.3 7573.01,3816.3 7467.04,3816.3 7410.06,3873.28 7410.06,3977.83 7477.77,4045.54 7477.77,4188.71 7644.41,4355.35 7644.41,4373.58 T15.5
NetSR4_6: SR4.6 T16.2 | length 1990.8
  Bottom Layer w10: SR4.6 7610,3512.06 7917.17,3204.88 8658.17,3204.88 8715,3261.72 8715,3574.31 8785.69,3645 8832.2,3645 8855,3667.8 8855,3748.43 8790,3813.43 T16.2
NetSR4_7: SR4.7 T16.5 | length 1703.5
  Bottom Layer w10: SR4.7 7660,3490.34 7925.46,3224.88 8649.88,3224.88 8695,3270 8695,3582.6 8790,3677.6 T16.5
NetSR4_9: SR4.9 SR5.14 | length 810.7
  Top Layer w10: v1(7720,3300) 7910,3300 v1(7910,3305)
  Bottom Layer w10: SR4.9 7745.75,3299.25 7745,3300 v1(7720,3300) ; v1(7910,3305) 7910,3300 7965.12,3244.88 8365.29,3244.88 8405,3284.59 SR5.14
NetSR4_15: SR4.15 T13.2 | length 999
  Bottom Layer w10: T13.2 6990,4040 7170,3860 7170,3784.79 7193.43,3761.35 7193.65,3761.35 7335.16,3619.84 7335.16,3459.42 7410,3384.57 SR4.15
NetSR5_1: SR5.1 T17.5 | length 303.5
  Bottom Layer w10: T17.5 8200.59,3810.24 8200.59,3792 8305,3687.6 SR5.1
NetSR5_2: SR5.2 T18.2 | length 992.4
  Bottom Layer w10: T18.2 7985,4184.32 8004.38,4203.7 8086.3,4203.7 8100,4190 8100,4188.43 8123.43,4165 8226.72,4165 8405,3986.72 8405,3619.37 8394.71,3619.37 8380.16,3604.82 8380.16,3590.16 SR5.2
NetSR5_3: SR5.3 T18.5 | length 1038.2
  Bottom Layer w10: T18.5 7985,4277.78 7995.59,4267.19 7995.59,4266.18 8011.3,4250.47 8169.53,4250.47 8425,3995 8425,3585 SR5.3 SR5.3@8405,3540
NetSR5_4: SR5.4 T19.2 | length 1220.8
  Bottom Layer w10: T19.2 8311.49,4650 8398.51,4562.98 8398.51,4489.55 8445,4443.06 8445,3575 SR5.4 SR5.4@8455,3530.16
NetSR5_5: SR5.5 T19.5 | length 1212.9
  Bottom Layer w10: T19.5 8405.83,4639.41 8457.91,4639.41 8478.51,4618.81 8478.51,4489.55 8530.88,4437.18 8530.88,3756.55 8505,3730.67 SR5.5 SR5.5@8505,3530.16
NetSR5_6: SR5.6 T20.2 | length 1254.9
  Bottom Layer w10: SR5.6 8555,4315.69 8720.61,4481.3 8938.02,4481.3 8957.4,4500.68 T20.2
NetSR5_7: SR5.7 T20.5 | length 1186.4
  Bottom Layer w10: SR5.7 8605,3579.66 8575,3609.66 8575,4220 8790,4435 8930.63,4435 8957.4,4408.23 T20.5 T20.5@8957.4,4371.77
NetSR5_9: SR5.9 SR6.14 | length 1545.8
  Top Layer w10: v1(8650,3410) 8660,3420 8670,3410 v1(8760,3410)
  Bottom Layer w10: v1(8650,3410) 8655,3405 SR5.9 ; v1(8760,3410) 8760,3340 8785,3315 9695,3315 9695,3265 9715.12,3244.88 9862.31,3244.88 9897.17,3279.75 9897.17,3299.25 SR6.14
NetSR5_15: SR5.15 T17.2 | length 454.1
  Bottom Layer w10: T17.2 8190,3645 8280.16,3554.84 8280.16,3459.42 8355,3384.57 SR5.15
NetSR6_1: SR6.1 T21.5 | length 919.6
  Bottom Layer w10: SR6.1 9802.02,3505 9807.02,3500 10424.75,3500 10534.41,3609.66 10534.41,3674.41 T21.5
NetSR6_2: SR6.2 T22.2 | length 149.5
  Bottom Layer w10: T22.2 9800.59,3658.58 9800.59,3633.43 9809.38,3624.65 9842.89,3624.65 9852.02,3615.52 SR6.2
NetSR6_3: SR6.3 T22.5 | length 286.4
  Bottom Layer w10: T22.5 9800.59,3794.41 9800.59,3776.18 9902.02,3674.75 SR6.3
NetSR6_4: SR6.4 T23.2 | length 1007.1
  Bottom Layer w10: T23.2 9630,4169.32 9649.38,4188.7 9745.62,4188.7 9774.32,4160 9845,4160 10082.02,3922.98 10082.02,3767.02 9952.02,3637.02 SR6.4
NetSR6_5: SR6.5 T23.5 | length 1068.9
  Bottom Layer w10: T23.5 9630,4261.77 9656.3,4235.47 9678.51,4235.47 9703.03,4260 9788.38,4260 9789.19,4260.81 9794.88,4260.81 10102.02,3953.67 10102.02,3747.02 10002.02,3647.02 SR6.5
NetSR6_6: SR6.6 T24.2 | length 1272.9
  Bottom Layer w10: T24.2 9925.15,4650 9950,4625.15 9950,4585 10185,4350 10185,3712.64 10077.17,3604.82 10077.17,3590.16 SR6.6
NetSR6_7: SR6.7 T24.5 | length 1220.5
  Bottom Layer w10: T24.5 10060,4650 10080.35,4629.65 10080.35,4601.49 10135,4546.85 10135,4429.17 10205,4359.17 10205,3667.98 10156.39,3619.37 10141.73,3619.37 10127.17,3604.82 10127.17,3590.16 SR6.7
NetSR6_9: SR6.9 SR7.14 | length 663.5
  Bottom Layer w10: SR6.9 10152.02,3268.77 10181.53,3239.25 10704.25,3239.25 10725,3260 SR7.14
NetSR6_15: SR6.15 T21.2 | length 1174.1
  Bottom Layer w10: SR6.15 9852.02,3432.02 9895,3475 10428.03,3475 10609.21,3656.18 10609.21,3738.38 10555.59,3792 10555.59,3810.24 T21.2
NetSR7_1: SR7.1 T25.5 | length 846.8
  Bottom Layer w10: T25.5 10583.19,4373.58 10583.19,4355.35 10629.21,4309.33 10629.21,3565 SR7.1
NetSR7_2: SR7.2 T26.2 | length 1905.5
  Bottom Layer w10: SR7.2 10700.16,3539.84 10700.16,3508.61 10758.77,3450 10966.57,3450 10999.84,3416.73 10999.84,3400.3 11195.27,3204.88 11389.88,3204.88 11409.88,3224.88 11428.57,3224.88 11428.69,3225 11441.31,3225 11441.43,3224.88 11478.57,3224.88 11478.69,3225 11491.31,3225 11491.43,3224.88 11528.57,3224.88 11528.69,3225 11541.31,3225 11541.43,3224.88 11578.57,3224.88 11578.69,3225 11591.31,3225 11591.43,3224.88 11628.57,3224.88 11628.69,3225 11641.31,3225 11641.43,3224.88 11748.17,3224.88 11844.21,3320.93 11844.21,3720.79 11780,3785 T26.2
NetSR7_3: SR7.3 T26.5 | length 1623.8
  Bottom Layer w10: SR7.3 10750.16,3539.84 10750.16,3525.18 10805.34,3470 10974.85,3470 11019.84,3425.01 11019.84,3408.59 11203.55,3224.88 11378.57,3224.88 11398.69,3245 11399.59,3245 11399.71,3244.88 11420.29,3244.88 11420.41,3245 11449.59,3245 11449.71,3244.88 11470.29,3244.88 11470.41,3245 11499.59,3245 11499.71,3244.88 11520.29,3244.88 11520.41,3245 11549.59,3245 11549.71,3244.88 11570.29,3244.88 11570.41,3245 11599.59,3245 11599.71,3244.88 11620.29,3244.88 11620.41,3245 11649.59,3245 11649.71,3244.88 11739.88,3244.88 11780,3285 T26.5
NetSR7_4: SR7.4 T27.2 | length 524.5
  Bottom Layer w10: SR7.4 10775,3553.09 10800.16,3527.93 10800.16,3525.18 10814.71,3510.63 10817.46,3510.63 10838.09,3490 11052.94,3490 11120,3557.06 T27.2
NetSR7_5: SR7.5 T27.5 | length 588.3
  Bottom Layer w10: SR7.5 10825,3531.38 10846.38,3510 11044.66,3510 11055.79,3521.13 11055.79,3699.3 11120,3763.51 T27.5
NetSR7_6: SR7.6 T28.2 | length 1016.7
  Bottom Layer w10: SR7.6 10875,3758.54 11155,4038.54 11155,4197.04 11093.34,4258.7 10979.38,4258.7 10970.59,4249.91 10970.59,4224.76 T28.2 T28.2@10949.41,4203.58
NetSR7_7: SR7.7 T28.5 | length 1043.3
  Bottom Layer w10: SR7.7 10925,3780.26 11175,4030.26 11175,4205.33 11101.63,4278.7 10989.46,4278.7 10960,4308.16 T28.5
NetSR7_9: SR7.9 SR8.14 | length 699.5
  Top Layer w10: v1(10950,3410) 11065,3410 v1(11070,3415)
  Bottom Layer w10: v1(10950,3410) 10975,3385 SR7.9 ; v1(11070,3415) 11240.12,3244.88 11370.29,3244.88 11384.84,3259.43 11384.84,3299.25 SR8.14
NetSR7_15: SR7.15 T25.2 | length 1263.2
  Bottom Layer w10: T25.2 10583.19,4509.41 10583.19,4491.18 10650.16,4424.21 10650.16,3422.64 10675,3397.8 SR7.15
NetSR8_1: SR8.1 T29.5 | length 1186.3
  Bottom Layer w10: SR8.1 11335.16,3590.16 11335.16,3604.82 11345.88,3615.54 11345.88,3689.17 11385.88,3729.17 11385.88,3957.39 11350,3993.27 11350,4473.06 11333.51,4489.55 11333.51,4535.37 11300.47,4568.4 11300.47,4640 T29.5
NetSR8_2: SR8.2 T30.2 | length 1180.7
  Bottom Layer w10: SR8.2 11365.88,3570.88 11365.88,3680.88 11480,3795 11480,4094.99 11730.45,4345.43 11758.73,4345.43 11810.79,4397.49 11810.79,4408.82 11825.19,4423.23 11825.19,4424.53 11875,4474.34 T30.2
NetSR8_3: SR8.3 T30.5 | length 1066.1
  Bottom Layer w10: SR8.3 11410,3695 11500,3785 11500,4086.7 11678.73,4265.43 11778.66,4265.43 11864.41,4351.18 11864.41,4369.41 T30.5
NetSR8_15: SR8.15 T29.2 | length 1512.4
  Bottom Layer w10: T29.2 11253.7,4640 11253.7,4586.89 11313.51,4527.08 11313.51,4481.27 11330,4464.78 11330,3984.99 11365.88,3949.1 11365.88,3737.45 11325.88,3697.45 11325.88,3623.83 11321.43,3619.37 11293.94,3619.37 11285,3610.43 11285,3406.75 11360,3331.75 SR8.15
RCK: IC2.6 SR1.12 SR2.12 SR3.12 SR4.12 SR5.12 SR6.12 SR7.12 SR8.12 | length 9317.1
  Top Layer w10: v1(6345,3434.37) 6345.63,3435 v1(6560,3435) v1(6560,3665) ; v1(7645,3405) 7650,3410 v1(8410,3410) ; v1(8650,3470) 8670,3450 8776.57,3450 8816.57,3410 v1(10002.02,3410) ; v1(10235,3410) v1(10825,3410) 10893.43,3410 10933.43,3450 10935,3450 10944.57,3459.57 v1(11350,3459.57)
  Bottom Layer w10: SR1.12@4375,3313.91 SR1.12 4381.94,3299.25 4381.94,3268.43 4425.49,3224.88 5298.57,3224.88 5298.69,3225 5311.31,3225 5311.43,3224.88 5420.29,3224.88 5480,3284.59 SR2.12 5480,3318.75 5510,3348.75 5510,3350 5560,3400 5560,3411.57 5608.43,3460 5641.57,3460 5747.95,3353.62 6264.25,3353.62 v1(6345,3434.37) ; v1(6560,3435) 6560,3304.25 SR3.12 6565.47,3299.25 6565.16,3298.95 6565.16,3194.99 6595.15,3165 7483.02,3165 7554.84,3236.82 7554.84,3299.25 SR4.12 7560,3320 v1(7645,3405) ; v1(6560,3665) 6561.06,3666.06 6561.06,4208.58 IC2.6 ; SR5.12 8505,3315 v1(8410,3410) 8590,3410 v1(8650,3470) ; SR6.12 v1(10002.02,3410) v1(10235,3410) ; SR7.12 v1(10825,3410) ; v1(11350,3459.57) 11364.34,3459.57 11510,3313.91 SR8.12
SA0: NX5.2 T21.3 | length 236.7
  Bottom Layer w10: NX5.2 10521.49,3923.22 10571.81,3872.91 10571.81,3831.42 T21.3
SA1: NX5.3 T21.6 | length 277.1
  Bottom Layer w10: NX5.3 10440.19,3685 T21.6
SA2: NX5.5 T22.3 | length 659.1
  Bottom Layer w10: T22.3 9720,3701.77 9720,3873.04 9841.96,3995 9915,3995 9998.07,3911.93 NX5.5
SA3: NX5.6 T22.6 | length 139
  Bottom Layer w10: T22.6 9827.4,3873.04 NX5.6
SA4: NX5.7 T23.3 | length 273.9
  Bottom Layer w10: T23.3 9603.19,4133.58 9603.19,4092.09 9640.23,4055.05 NX5.7
SA5: NX5.9 T23.6 | length 206.1
  Bottom Layer w10: T23.6 9780.09,4280 NX5.9
SA6: NX5.10 T24.3 | length 319.1
  Bottom Layer w10: T24.3 9900,4676.81 9855.47,4676.81 9855.47,4549.39 NX5.10
SA7: NX5.11 T24.6 | length 130
  Bottom Layer w10: T24.6 10092.63,4555.8 NX5.11
SA8: NX5.13 T25.3 | length 338.7
  Bottom Layer w10: NX5.13 10520,4570 10599.41,4570 10599.41,4530.59 T25.3
SA9: NX5.14 T25.6 | length 107.3
  Bottom Layer w10: NX5.14 10466.13,4315.11 T25.6
SB0: NX6.2 T26.3 | length 197.4
  Bottom Layer w10: NX6.2 11740.67,3923.22 11817.4,3846.49 T26.3
SB1: NX6.3 T26.6 | length 237.7
  Bottom Layer w10: NX6.3 11736.9,3669.17 T26.6
SB2: NX6.5 T27.3 | length 287.3
  Bottom Layer w10: T27.3 11093.19,3669.17 11093.19,3708.41 11098.48,3713.7 11159.41,3713.7 NX6.5
SB3: NX6.6 T27.6 | length 118.7
  Bottom Layer w10: T27.6 11157.4,3922.16 NX6.6
SB4: NX6.7 T28.3 | length 252.4
  Bottom Layer w10: T28.3 10922.6,4175 11042.55,4055.05 NX6.7
SB5: NX6.9 T28.6 | length 131.3
  Bottom Layer w10: T28.6 11123.11,4350 NX6.9
SB6: NX6.10 T29.3 | length 281.9
  Bottom Layer w10: T29.3 11198.58,4666.81 11180.35,4666.81 11164.65,4651.11 11164.65,4521.1 NX6.10
SB7: NX6.11 T29.6 | length 108.3
  Bottom Layer w10: T29.6 11373.51,4574.09 NX6.11
SB8: NX6.13 T30.3 | length 362.8
  Bottom Layer w10: NX6.13 11810.88,4580 11875,4580 11901.81,4553.19 11901.81,4526.42 T30.3
SB9: NX6.14 T30.6 | length 121.5
  Bottom Layer w10: NX6.14 11821.58,4380 T30.6
SCK: IC2.5 SR1.11 SR2.11 SR3.11 SR4.11 SR5.11 SR6.11 SR7.11 SR8.11 | length 8790.4
  Top Layer w10: v1(4421.94,3285) 4421.94,3293.06 4445,3270 v1@5530,3270 ; v1(5525,3270) v1@5530,3270 ; v1(6630,3240) v1@6627.18,3240 ; v1(6645,3410) 6805,3570 v1(6805,4445) ; v1@7605,3240 7615,3250 8512.37,3250 8527.37,3265 v1(8555,3265) 10032.02,3265 ; v1(7605,3252.63) 7605,3264.02 7585.98,3245 6893.04,3245 6858.04,3280 6663.14,3280 6625.16,3242.02 v1@6627.18,3240 ; v1(10052.02,3285) 10032.02,3265 ; 10820,3265 11535,3265 v1(11560,3290) ; v1(10875,3285) 10855,3265 10052.02,3265 10032.02,3265 ; v1@5530,3270 6193.43,3270 6223.43,3240 v1@6627.18,3240
  Bottom Layer w10: v1(6630,3240) 6625,3240 6615,3230 SR3.11 6615,3380 v1(6645,3410) ; IC2.5 6720,4445 v1(6805,4445) ; v1(7605,3252.63) 7605,3294.25 SR4.11
SCL: IC2.20 IC3.8 R4.1 | length 895.4
  Bottom Layer w10: IC3.8 5649,4916 R4.1 5640,4940 5640,4954.56 5669.97,4984.53 5949.53,4984.53 5960,4974.06 5960,4733.82 IC2.20
SDA: IC2.19 IC3.7 R5.1 | length 721.9
  Bottom Layer w10: R5.1 5821.26,4939.83 5680.71,4799.29 5825,4655 5903.03,4655 6033.03,4525 IC2.19
pads on no net: Header1.1 Header1.5 IC2.1 IC2.2 IC2.3 IC2.7 IC2.9 IC2.10 IC2.11 IC2.12 IC2.13 IC2.14 IC2.16 IC2.17 IC2.18 IC3.1 IC3.3 IC3.4 NX1.1 NX1.8 NX2.1 NX2.8 NX3.1 NX3.8 NX4.1 NX4.8 NX5.1 NX5.8 NX6.1 NX6.8 SR8.4 SR8.5 SR8.6 SR8.7 SR8.9
copper on no net: | length 23657.3
  Top Layer w10: 2200,3130 2200,5115 12045,5115 12045,3130 2202.67,3130

## Polygon pours and split planes (outlines as drawn)
GND on Bottom Layer (solid, pour order 14): 2200,5115 2200,3130 12045,3130 12045,5115
GND on Bottom Layer "Bottom Layer-GND 1" (solid, pour order 2): 11635,5175
3V3 on Top Layer (solid, pour order 12): 2200,5115 2200,3130 12045,3130 12045,5115
3V3 on Top Layer "Top Layer-3V3 1" (solid, pour order 8): 12045,5115

## Text inside footprints (layer, text, board x,y; h text height)
Q1: Top Overlay "1" at 2906.85,4334.84 h59.06 r270; Top Overlay "2" at 2906.85,4244.69 h59.06 r270; Top Overlay "3" at 2906.85,4144.69 h59.06 r270